# Altium PCB Breakout_for_ics4343.PcbDoc
Units mil, origin at the board's own origin, x right, y up, seen from the top; angles counter-clockwise.
Board outline 1000 x 1025 mil, 2 copper layers (Top Layer, Bottom Layer); 3 components, 5 nets, 29 pads, 0 vias.
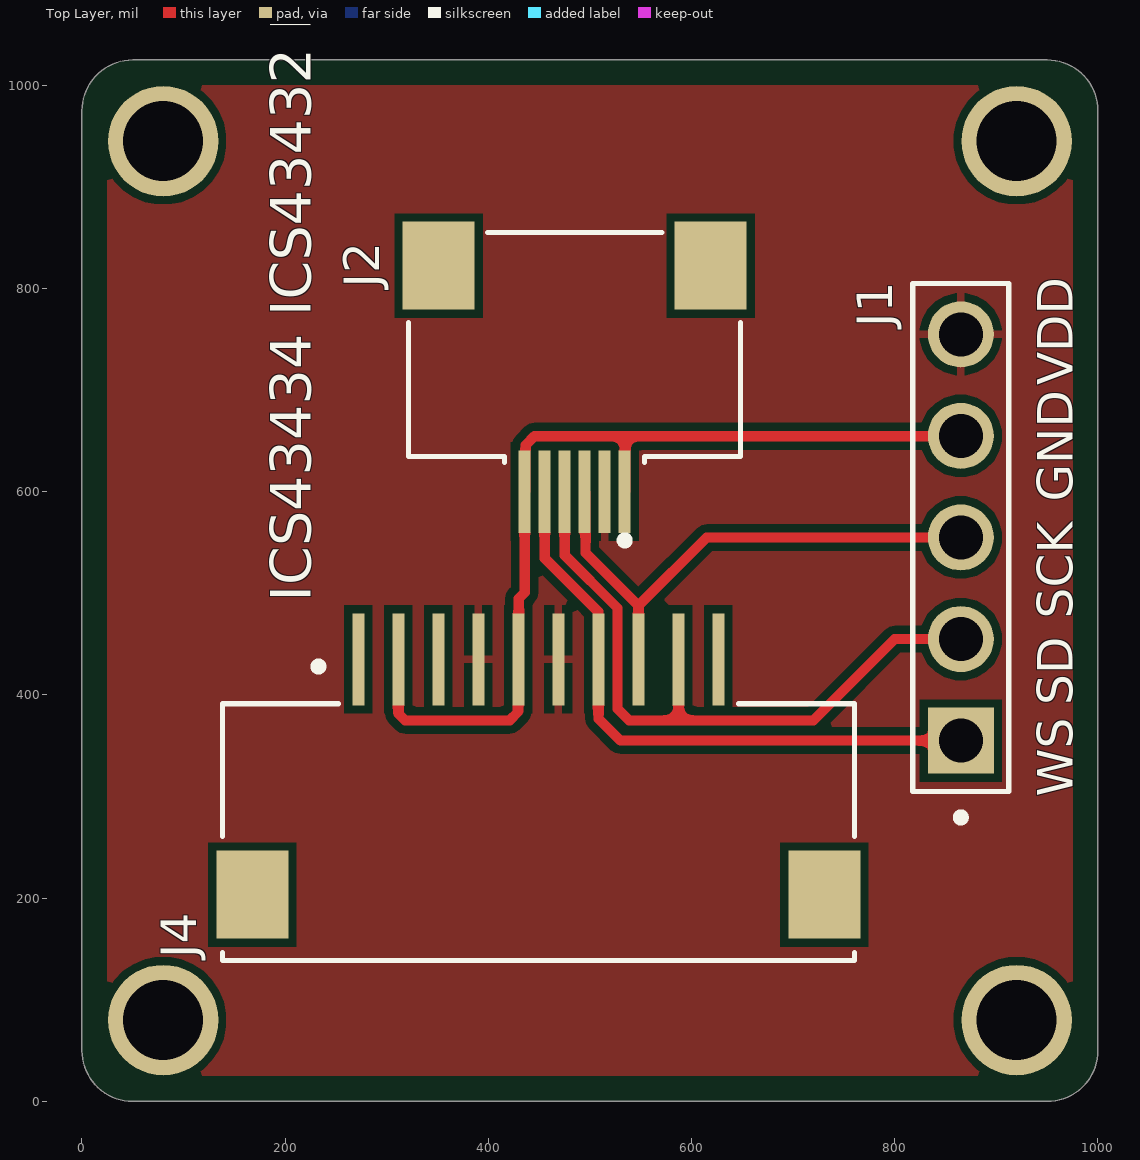
[diagram p0: Top Layer view]
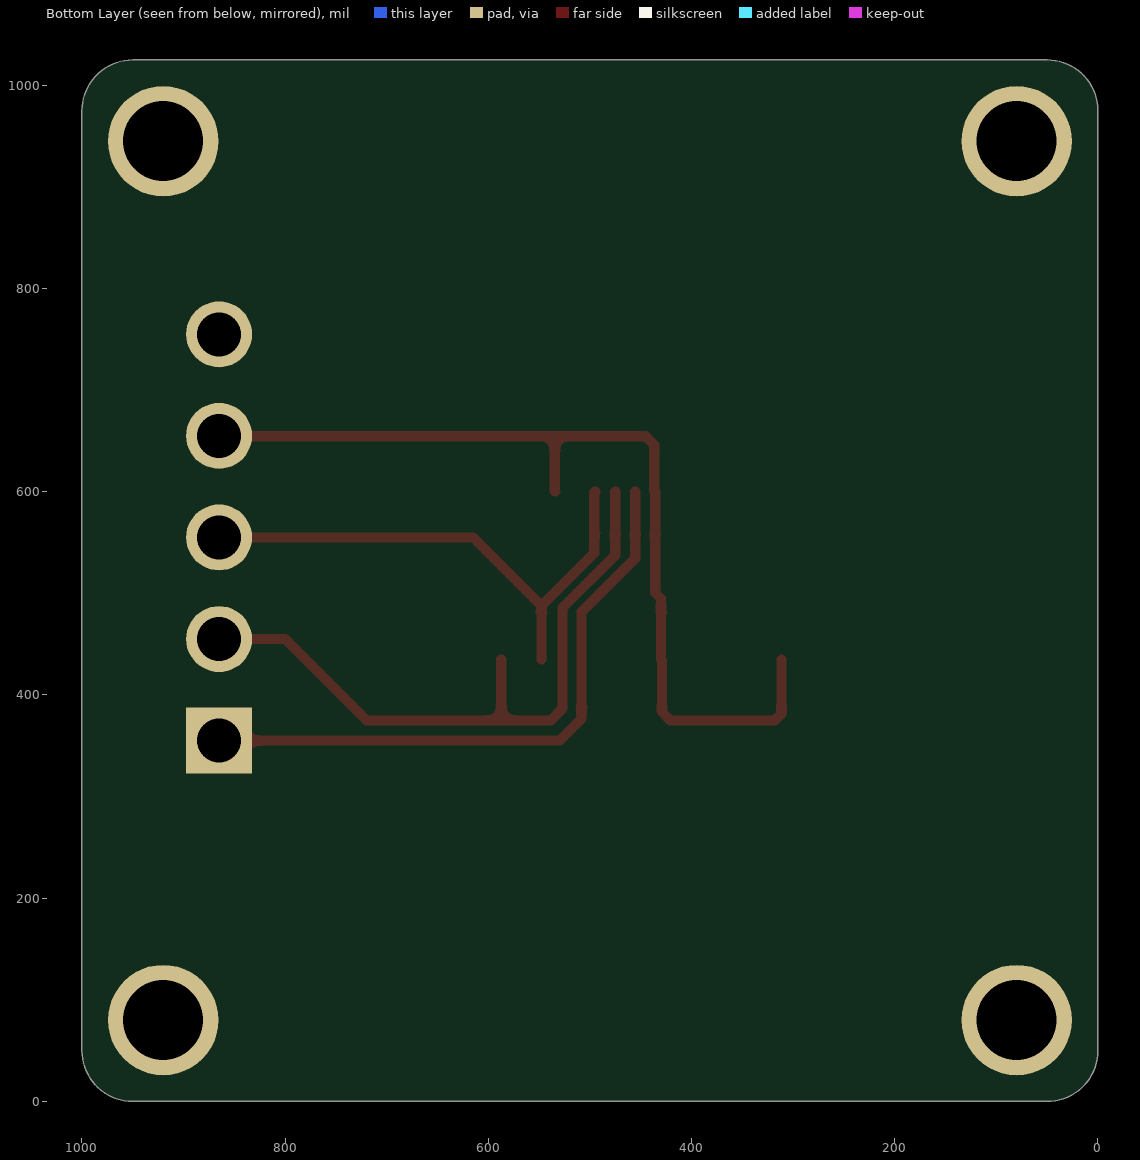
[diagram p1: Bottom Layer view, seen from below]

## Layer stack, top to bottom
Top Solder: solder mask 0.4, Solder Resist, Dk 3.5
Top Layer: signal copper 1.4
Dielectric 1: dielectric 12.6, FR-4, Dk 4.8
Bottom Layer: signal copper 1.4
Bottom Solder: solder mask 0.4, Solder Resist, Dk 3.5

## Board outline
50,0 cw(c50,50) 0,50 0,975 cw(c50,975) 50,1025 950,1025 cw(c950,975) 1000,975 1000,50 cw(c950,50) 950,0

## Design rules (kind name [scope] priority, off if disabled: settings)
BoardOutlineClearance [All] p1: gap=9.84 ignorepadtopadclearanceinfootprint=FALSE except(0: Arc-SplitContinuation Track-SplitContinuation SMDPad-SplitContinuation THPad-SplitContinuation Via-SplitContinuation Fill-SplitContinuation Poly-SplitContinuation Region-SplitContinuation Text-SplitContinuation)
Clearance Clearance-Guimocircuito [All] p1: gap=7.87 ignorepadtopadclearanceinfootprint=FALSE except(0: Arc-Hole Track-Hole SMDPad-Hole THPad-Hole Via-Hole Fill-Hole Poly-Hole Region-Hole Text-Hole; 5.91: Arc-Arc Arc-Track Track-Track)
ComponentClearance [All] p1: gap=9.84 collisioncheckmode=3 verticalgap=9.84 showdistances=FALSE
DiffPairsRouting [All] p1: maxlimit=9.84 minlimit=9.84 mostfreqgap=9.84 toplayer_minwidth=15 toplayer_maxwidth=15 toplayer_prefwidth=15 bottomlayer_minwidth=15 bottomlayer_maxwidth=15 bottomlayer_prefwidth=15 maxuncoupledlength=492.13
Height [All] p1: minheight=0 maxheight=984.25 prefheight=492.13
HoleSize HoleSize-PTH [All] p1: absolutevalues=TRUE maxlimit=78.74 minlimit=9.84 maxpercent=80.000 minpercent=20.000
HoleToHoleClearance [All] p1: gap=13.78 allowstackedmicrovias=TRUE
MinimumAnnularRing "Minimum IAR <=0.45mm" [((ObjectKind = 'Pad') OR (ObjectKind = 'Via')) And (Layer = 'MultiLayer') And (HoleDiameter <= AsMM(0.45))] p1: minimumring=8 // minimum inner annular ring for pads <= 0.45mm finished hole size
MinimumSolderMaskSliver [All] p1: minsoldermaskwidth=3.15
PlaneClearance PlaneClearance-IPI [All] p1: clearance=9.84
PlaneConnect [All] p1: planeconnectstyle=Relief reliefexpansion=6.89 reliefentries=4 reliefconductorwidth=7.87 reliefairgap=7.87
PolygonConnect PolygonConnect-xTW [All] p1: connectstyle=Relief reliefconductorwidth=7.87 reliefentries=4 polygonreliefangle="90 Angle" airgapwidth=7.87
RoutingCorners [All] p1: cornerstyle=45-Degree minsetback=98.43 maxsetback=98.43
RoutingVias "RoutingVias > 0.45mm" [(ObjectKind = 'Via') And (HoleDiameter > AsMM(0.45))] p1: holewidth=19.68 width=33.46 viastyle="Through Hole" minholewidth=19.68 minwidth=33.46 maxholewidth=35.43 maxwidth=49.21 // finishet hole size > 0.45mm
RoutingVias "RoutingVias <= 0.45mm" [(ObjectKind = 'Via') And (HoleDiameter <= AsMM(0.45))] p2: holewidth=12 width=25.59 viastyle="Through Hole" minholewidth=8 minwidth=23.62 maxholewidth=17.72 maxwidth=31.5 // finishet hole size <= 0.45mm
SilkToSilkClearance [All] p1: silktosilkclearance=7.87
SilkToSolderMaskClearance SilkscreenOverComponentPads [IsText] p1: minsilkscreentomaskgap=7.87 clearancetoexposedcopper=TRUE
SolderMaskExpansion [All] p1: expansion=0 istentingtop=FALSE
UnRoutedNet [All] p1: checkbadconnections=TRUE
Width Width-xTW [All] p1: maxlimit=59.06 minlimit=3.94 preferedwidth=10
18 further rules are at their usual default settings.

## Components (designator, comment, footprint, x,y, rotation, side; value= is the part's Value field where it differs from the comment)
J1 "77311-101-05LF" AMPHENOL_77311-101-05LF 865,555 r90 top
J2 "F31L-1A7H1-11006" AMPHENOL_F31L-1A7H1-11006 485,745 r180 top
J4 "F51L-1A7H1-11010" AMPHENOL_F51L-1A7H1-11010 449.32,203.56 r0 top

## Footprints (in the part's own frame and the unit in brackets; to place one, negate y for a bottom-side part, rotate by r counter-clockwise, add the part's x,y. Pads: shape width x height; smd on the part's side, far side on the other; paste and mask are expansions set on the pad)
AMPHENOL_77311-101-05LF [mm]
  rect 1.65x1.65 / inner round 1.65 / far side rect 1.65x1.65 hole 1.1: 01(-5.08,0)
  round 1.65 hole 1.1: 02(-2.54,0) 03(0,0) 04(2.54,0) 05(5.08,0)
  silkscreen extent -7.1,-1.2 6.35,1.2
AMPHENOL_F31L-1A7H1-11006 [mm]
  rect 0.3x2.062 smd mask+0.05: 1(-1.25,3.68) 2(-0.75,3.68) 3(-0.25,3.68) 4(0.25,3.68) 5(0.75,3.68) 6(1.25,3.68)
  rect 1.8x2.2 smd mask+0.05: S1(-3.4,-1.97) S2(3.4,-1.97)
  silkscreen extent -4.15,-2.8 4.15,5, body extent -4.14,-3.61 4.16,3.96, height 2.5
AMPHENOL_F51L-1A7H1-11010 [mm]
  rect 0.3x2.298 smd: 1(-4.5,5.879) 2(-3.5,5.879) 3(-2.5,5.879) 4(-1.5,5.879) 5(-0.5,5.879) 6(0.5,5.879) 7(1.5,5.879) 8(2.5,5.879) 9(3.5,5.879) 10(4.5,5.879)
  rect 1.8x2.2 smd: SH1(-7.15,0) SH2(7.15,0)
  silkscreen extent -7.9,-1.65 7.9,5.8, body extent -7.9,-1.65 7.9,5.92, height 2.55

## Part data
J1: Package=None, Availability=Unavailable, MF=Amphenol, MP=77311-101-05LF, Price=None
J2: "Flex Connector, 0.50mm Pitch, Height 2.55mm, Right angle, Flip type, ZIF, 6 position , With MYLAR", Package=None, Supplier Part Number=538-22-28-4063, Availability="In Stock", Check_prices=https://www.snapeda.com/parts/F31L-1A7H1-11006/Amphenol+FCI/view-part/?ref=eda, MF="Amphenol ICC (FCI)", MP=F31L-1A7H1-11006, Price=None, Purchase-URL=https://pricing.snapeda.com/search?q=F31L-1A7H1-11006&ref=eda, SnapEDA_Link=https://www.snapeda.com/parts/F31L-1A7H1-11006/Amphenol+FCI/view-part/?ref=snap, Supplier=Mouser
J4: "Flex Connector, 1.00mm Pitch, Height 2.55mm, Right angle, Flip type, ZIF, 10 position , With MYLAR", Package=None, Availability="In Stock", Check_prices=https://www.snapeda.com/parts/F51L-1A7H1-11010/Amphenol+FCI/view-part/?ref=eda, MF="Amphenol ICC (FCI)", MP=F51L-1A7H1-11010, Price=None, Purchase-URL=https://pricing.snapeda.com/search?q=F51L-1A7H1-11010&ref=eda, SnapEDA_Link=https://www.snapeda.com/parts/F51L-1A7H1-11010/Amphenol+FCI/view-part/?ref=snap

## Free pads (board coordinates)
  round 108.74 hole 78.74: 1(80,945) 2(920,945) 3(80,80) 4(920,80)

## Nets (pads, with @x,y where several pads share a name; then routed paths per layer and width w, separated by ;. In a path a pad name is that pad's centre, name@x,y a point inside that pad or via, vN(x,y) a via of type N, cw(c..) or ccw(c..) an arc to the next point about the centre after c; other vN are vias at no path point)
GND: J1.04 J2.1 J2.6 J4.2 J4.5 | length 930
  Top Layer w10: J4.2 311.52,381.52 318.05,375 421.01,375 429.15,383.14 429.15,434.52 430,435.37 430,495 435.79,500.79 J2.6 436.69,601.02 436.69,646.04 445.33,654.68 534.68,654.68 ; J2.1 534.68,600.58 534.68,654.68 ; J1.04 864.68,654.68 534.68,654.68
SCK: J1.03 J2.3 J4.8 | length 530.9
  Top Layer w10: J2.3 495.75,599.21 495.75,539.75 547.75,487.75 J4.8 ; 548.65,488.65 615,555 J1.03
SD: J1.02 J2.4 J4.9 | length 671.1
  Top Layer w10: J2.4 475.16,537.56 527.16,485.56 527.16,386.25 538.4,375 587.28,375 ; J4.9 587.28,434.84 587.28,375 ; J1.02 800,455 720,375 587.28,375
VDD: J1.05 J2.2 J4.4 J4.6
WS: J1.01 J2.5 J4.7 | length 611
  Top Layer w10: J2.5 455.47,534.53 508.19,481.81 508.19,435.18 J4.7 508.38,376.62 530,355 J1.01
pads on no net: J2.S1 J2.S2 J4.1 J4.3 J4.10 J4.SH1 J4.SH2

## Polygon pours and split planes (outlines as drawn)
VDD on Top Layer "VDD_top_layer" (solid, pour order 0): 25,25 975,25 975,1000 25,1000

## Silkscreen, mask and mechanical layers (free items; w line width, h text height)
Top Overlay:
  text "VDD" at 975,705 h35 r90
  text "GND" at 975,590 h35 r90
  text "ICS43434 ICS43432 BREAKOUT" at 225,491.56 h40 r90
  text "SCK" at 975,475 h35 r90
  text "SD" at 975,390 h35 r90
  text "WS" at 975,300 h35 r90
Board Outline:
  the board outline again, w10